# Altium PCB CPLD_CLK_V2.0.PcbDoc
Units mm, origin at the board's own origin, x right, y up, seen from the top; angles counter-clockwise.
Board outline 48.26 x 29.21 mm, 2 copper layers (Top Layer, Bottom Layer); 41 components, 46 nets, 228 pads, 29 vias.
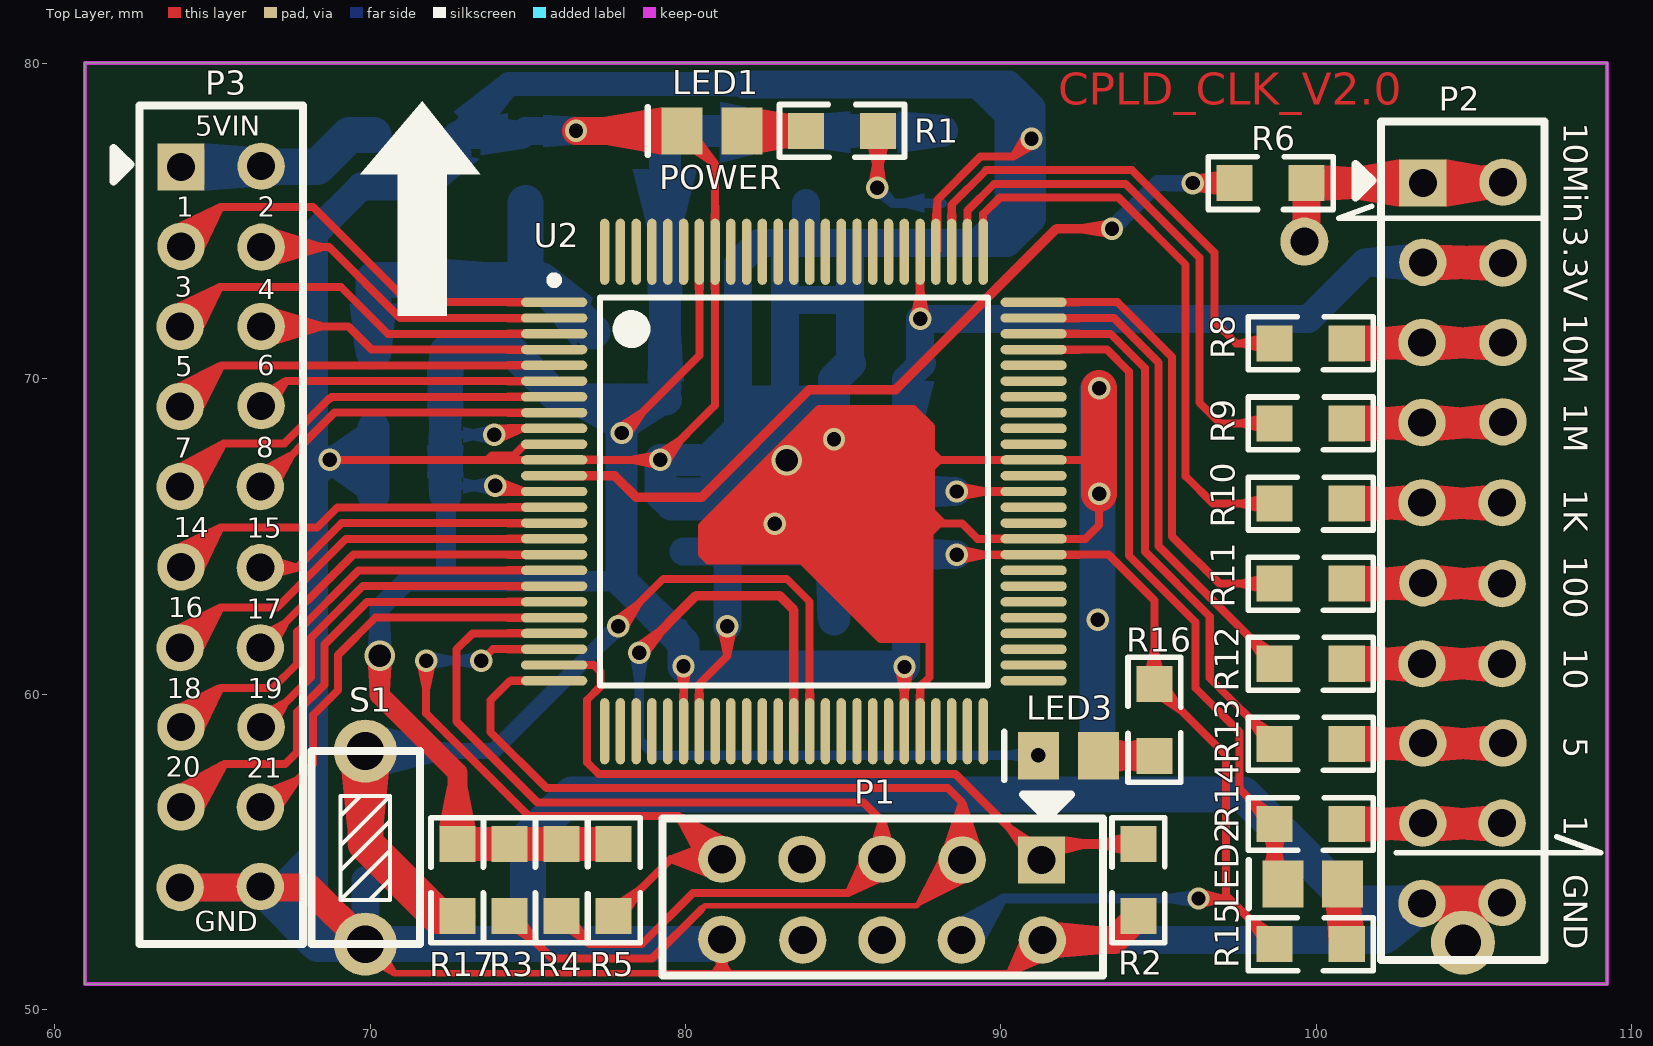
[diagram p0: Top Layer view]
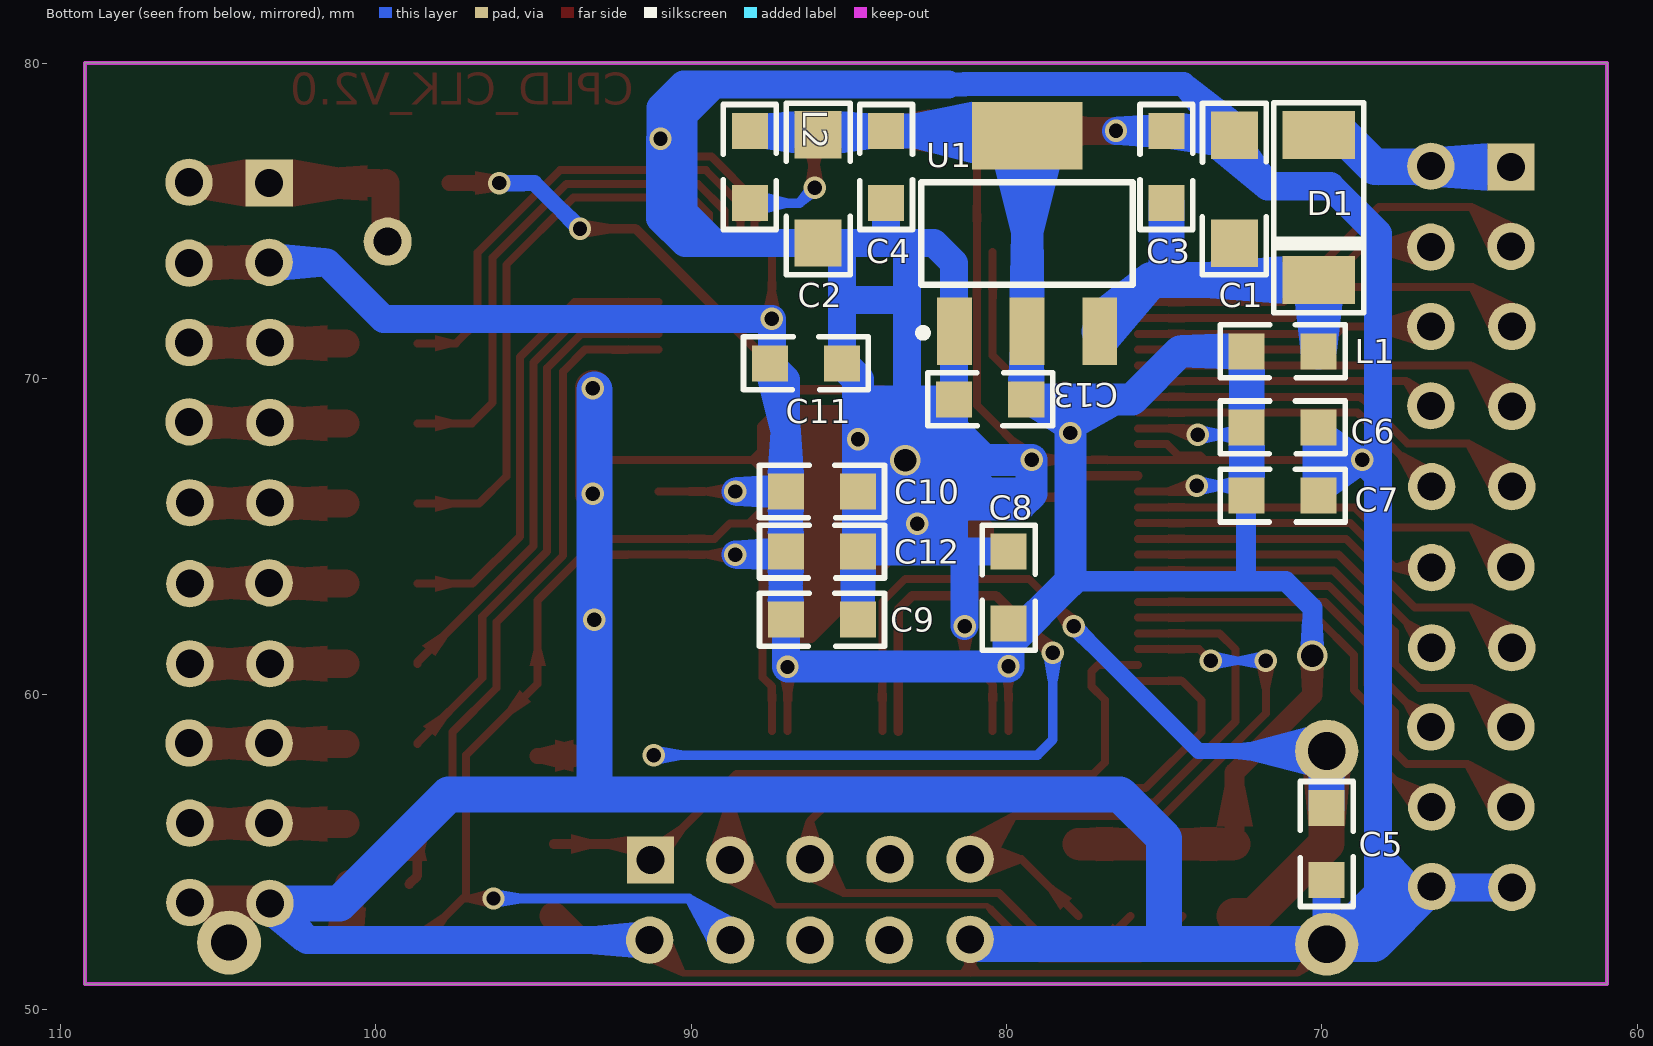
[diagram p1: Bottom Layer view, seen from below]

## Layer stack, top to bottom
Top Solder: solder mask 0.0102, Solder Resist, Dk 3.5
Top Layer: signal copper 0.0356
Dielectric 1: dielectric 0.32, FR-4, Dk 4.8
Bottom Layer: signal copper 0.0356
Bottom Solder: solder mask 0.0102, Solder Resist, Dk 3.5

## Board outline
60.96,80.01 109.22,80.01 109.22,50.8 60.96,50.8

## Design rules (kind name [scope] priority, off if disabled: settings)
Clearance [All] p1: gap=0.178
ComponentClearance [All] p1 off: gap=0 collisioncheckmode=3 verticalgap=0 showdistances=FALSE
PolygonConnect [All] p1: connectstyle=Relief reliefconductorwidth=0.254 reliefentries=4 polygonreliefangle="90 Angle" airgapwidth=0.254
RoutingVias [All] p1: holewidth=0.711 width=1.27 viastyle="Through Hole" minholewidth=0.711 minwidth=1.27 maxholewidth=0.711 maxwidth=1.27
SilkToBoardRegionClearance [All] p1 off:
SilkToSilkClearance [All] p1 off: silktosilkclearance=0.254
SilkToSolderMaskClearance [IsPad] p1 off: minsilkscreentomaskgap=0.254 clearancetoexposedcopper=TRUE
SolderMaskExpansion [All] p1: expansion=0.102
Width [All] p1: maxlimit=2.54 minlimit=0.178 preferedwidth=0.254 minimp=50.000000 maximp=50.000000 favimp=50.000000
26 further rules are at their usual default settings.

## Components (designator, comment, footprint, x,y, rotation, side; value= is the part's Value field where it differs from the comment)
C1 "10uF" 1206 72.771,74.295 r90 bottom
C2 "10uF" 1206 85.979,77.724 r270 bottom
C3 "0.1uF" 0805 74.93,77.851 r270 bottom
C4 "0.1uF" 0805 83.82,75.565 r90 bottom
C5 "104" 0805 69.85,54.102 r90 bottom
C6 "0.1uF" 0805 70.104,68.453 r0 bottom
C7 "0.1uF" 0805 70.104,66.294 r0 bottom
C8 "0.1uF" 0805 79.934,64.516 r270 bottom
C9 "0.1uF" 0805 84.709,62.357 r0 bottom
C10 "0.1uF" 0805 84.709,66.421 r0 bottom
C11 "0.1uF" 0805 85.217,70.485 r0 bottom
C12 "0.1uF" 0805 84.709,64.516 r0 bottom
C13 "0.1uF" 0805 81.661,69.342 r180 bottom
D1 "1N5819" "二极管 贴片 2010" 70.104,77.724 r270 bottom
L1 "磁珠" 0805 70.104,70.866 r0 bottom
L2 "磁珠" 0805 88.138,77.851 r270 bottom
LED1 "红色" LED0805 81.788,77.851 r180 top
LED2 "红色" LED0805 100.838,53.975 r180 top
LED3 "红色" LED0805 93.091,58.039 r180 top
P1 "DC3压线座" "双排插针 2.54 2*5" 91.313,54.737 r270 top
P2 "双排插针2.54 2*10" "双排插针 2.54 2*10" 103.378,76.2 r0 top
P3 "双排插针2.54 2*10" "双排插针 2.54 2*10" 64.008,76.708 r0 top locked
R1 "4.7K" 0805 83.82,77.851 r0 top
R2 "1k" 0805 94.361,55.245 r270 top
R3 "10k" 0805 74.422,55.245 r270 top
R4 "10k" 0805 76.073,55.245 r270 top
R5 "10k" 0805 77.724,52.959 r90 top
R6 "49.9" 0805 97.409,76.2 r0 top
R8 "49.9" 0805 98.679,71.12 r0 top
R9 "49.9" 0805 98.679,68.58 r0 top
R10 "49.9" 0805 98.679,66.04 r0 top
R11 "49.9" 0805 98.679,63.5 r0 top
R12 "49.9" 0805 98.679,60.96 r0 top
R13 "49.9" 0805 98.679,58.42 r0 top
R14 "49.9" 0805 98.679,55.88 r0 top
R15 "4.7K" 0805 98.679,52.07 r0 top
R16 "100" 0805 94.869,58.039 r90 top
R17 "10k" 0805 72.771,55.245 r270 top
S1 "key" "按键 轻触  6*3" 69.85,52.07 r180 top
U1 "AZ1117H-3.3V" SOT223 81.661,71.501 r180 bottom
U2 "EPM240T100C5N" TQFP100 83.439,66.421 r0 top locked

## Footprints (in the part's own frame and the unit in brackets; to place one, negate y for a bottom-side part, rotate by r counter-clockwise, add the part's x,y. Pads: shape width x height; smd on the part's side, far side on the other; paste and mask are expansions set on the pad)
0805 [mil]
  rect 45x45 smd: 1(0,0) 2(90,0)
  silkscreen extent -33,-33 123,33
1206 [mm]
  rect 1.5x1.5 smd: 1(-0.005,0) 2(3.424,0)
  silkscreen extent -1.01,-1.01 4.43,1.02
LED0805 [mm] "Chip Capacitor; Body 2.0 x 1.2 mm (LxW typ)"
  rect 1.3x1.5 smd: 1(0,0) 2(1.9,0)
  silkscreen extent 2.98,-0.76 2.98,0.76
SOT223 [mm] "SOT-223/SC-73; 4 Leads; Body 6.7 x 7.3 mm, inc. leads (LxW max)"
  rect 1.1x2.15 smd: 1(0.011,-0.001) 2(2.311,-0.001) 3(4.611,-0.001)
  rect 3.5x2.15 smd: 4(2.311,6.199)
  silkscreen extent -1.11,-0.18 5.66,4.72
TQFP100 [mm] "Thin QFP, 100-Leads, Body 14x14mm, Pitch 0.5mm, IPC Low Density"
  oval 2.1x0.3 smd: 1(-7.6,6) 2(-7.6,5.5) 3(-7.6,5) 4(-7.6,4.5) 5(-7.6,4) 6(-7.6,3.5) 7(-7.6,3) 8(-7.6,2.5) 9(-7.6,2) 10(-7.6,1.5) 11(-7.6,1) 12(-7.6,0.5) 13(-7.6,0) 14(-7.6,-0.5) 15(-7.6,-1) 16(-7.6,-1.5) 17(-7.6,-2) 18(-7.6,-2.5) 19(-7.6,-3) 20(-7.6,-3.5) 21(-7.6,-4) 22(-7.6,-4.5) 23(-7.6,-5) 24(-7.6,-5.5) 25(-7.6,-6) 51(7.6,-6) 52(7.6,-5.5) 53(7.6,-5) 54(7.6,-4.5) 55(7.6,-4) 56(7.6,-3.5) 57(7.6,-3) 58(7.6,-2.5) 59(7.6,-2) 60(7.6,-1.5) 61(7.6,-1) 62(7.6,-0.5) 63(7.6,0) 64(7.6,0.5) 65(7.6,1) 66(7.6,1.5) 67(7.6,2) 68(7.6,2.5) 69(7.6,3) 70(7.6,3.5) 71(7.6,4) 72(7.6,4.5) 73(7.6,5) 74(7.6,5.5) 75(7.6,6)
  oval 0.3x2.1 smd: 26(-6,-7.6) 27(-5.5,-7.6) 28(-5,-7.6) 29(-4.5,-7.6) 30(-4,-7.6) 31(-3.5,-7.6) 32(-3,-7.6) 33(-2.5,-7.6) 34(-2,-7.6) 35(-1.5,-7.6) 36(-1,-7.6) 37(-0.5,-7.6) 38(0,-7.6) 39(0.5,-7.6) 40(1,-7.6) 41(1.5,-7.6) 42(2,-7.6) 43(2.5,-7.6) 44(3,-7.6) 45(3.5,-7.6) 46(4,-7.6) 47(4.5,-7.6) 48(5,-7.6) 49(5.5,-7.6) 50(6,-7.6) 76(6,7.6) 77(5.5,7.6) 78(5,7.6) 79(4.5,7.6) 80(4,7.6) 81(3.5,7.6) 82(3,7.6) 83(2.5,7.6) 84(2,7.6) 85(1.5,7.6) 86(1,7.6) 87(0.5,7.6) 88(0,7.6) 89(-0.5,7.6) 90(-1,7.6) 91(-1.5,7.6) 92(-2,7.6) 93(-2.5,7.6) 94(-3,7.6) 95(-3.5,7.6) 96(-4,7.6) 97(-4.5,7.6) 98(-5,7.6) 99(-5.5,7.6) 100(-6,7.6)
  silkscreen extent -7.72,-6.15 6.15,6.82
"二极管 贴片 2010" [mil]
  rect 60x91 smd: 1(0,0) 2(181,0)
  silkscreen extent -40,-56 222,56
"双排插针 2.54 2*5" [mm]
  rect 1.5x1.5 hole 0.889: 1(0,-0.025)
  round 1.5 hole 0.889: 2(2.54,0) 3(0,-2.54) 4(2.54,-2.565) 5(-0.025,-5.08) 6(2.54,-5.08) 7(-0.025,-7.62) 8(2.54,-7.595) 9(-0.025,-10.16) 10(2.515,-10.16)
  silkscreen extent -2.08,-12.04 3.66,1.93
"双排插针 2.54 2*10" [mil]
  rect 59.06x59.06 hole 35: 1(0,0)
  round 59.06 hole 35: 2(100,1) 3(0,-99) 4(100,-100) 5(-1,-199) 6(100,-199) 7(-1,-299) 8(100,-298) 9(-1,-399) 10(99,-399) 11(0,-499) 12(99,-500) 13(-1,-600) 14(99,-600) 15(0,-699) 16(100,-699) 17(0,-799) 18(99,-799) 19(-1,-899) 20(99,-898)
  silkscreen extent -84,-970 152,77
"按键 轻触  6*3" [mm]
  round 2 hole 1.2: 1(0,0) 2(0,-6.121)
  silkscreen extent -1.73,-6.12 1.7,0

## Part data
C1 C2: library part "Cap Pol1", "Polarized Capacitor (Radial)"
C3 C4 C5 C6 C7 C8 C9 C10 C11 C12 C13: library part "电容 贴片 0805"
D1: library part "二极管 1N5822"
LED1 LED2 LED3: library part "二极管 贴片发光 0805"
P1: library part "联结件 DC3 2*5"
P2 P3: library part "联结件 双排插针 2.54 2*10"
R1 R2 R3 R4 R5 R6 R8 R9 R10 R11 R12 R13 R14 R15 R16 R17: library part "电阻 贴片 0805"
S1: library part "按键 轻触 6*6"
U1: library part "贴片芯片 SPX1117M3-5.0"

## Free pads (board coordinates)
  round 1.524 hole 0.889: 0(99.619,74.346)
  round 2.032 hole 1.143: 0(104.648,52.121)

## Via types
v1: diameter 0.711, hole 0.457, Top Layer to Bottom Layer, 27 vias
v2: diameter 0.965, hole 0.711, Top Layer to Bottom Layer, 2 vias

## Nets (pads, with @x,y where several pads share a name; then routed paths per layer and width w, separated by ;. In a path a pad name is that pad's centre, name@x,y a point inside that pad or via, vN(x,y) a via of type N, cw(c..) or ccw(c..) an arc to the next point about the centre after c; other vN are vias at no path point)
5V: D1.1 P3.1 P3.2 | length 6.5
  Bottom Layer w1.143: P3.1 68.326,76.708 69.342,77.724 D1.1
10M_IN: P2.1 P2.2 pad.0@99.619,74.346 R6.2 | length 8
  Top Layer w0.889: pad.0@99.695,74.143 R6.2 ; R6.2@99.949,76.2 P2.1 P2.2@105.893,76.2
+3.3V: C2.1 C4.2 C6.2 C7.2 C8.2 C9.2 C10.2 C11.2 C12.2 C13.2 L1.2 L2.1 P1.4 P2.3 P2.4 R3.1 R4.1 R5.2 R15.1 R16.2 R17.1 U1.2 U1.4 U2.9 U2.13 U2.31 U2.45 U2.59 U2.63 U2.80 U2.94 | length 155.9
  Top Layer w0.254: v1@74.136,68.421 U2.9 ; v1@74.143,66.421 U2.13 ; v1(77.978,68.275) 80.439,70.736 U2.94 ; U2.31 v1(79.939,60.879) ; U2.45 v1@86.939,61.082 ; v1(87.439,71.894) U2.80 ; v1(88.595,64.421) U2.59 93.414,64.421 94.869,62.966 R16.2 97.13,58.064 97.13,53.619 ; v1(88.595,66.421) U2.63 ; v1(96.266,53.518) 97.028,53.518 ; 97.447,53.302 97.231,53.518 ; R15.1 97.231,53.518 ; 97.028,53.518 97.13,53.619 ; 97.028,53.518 97.231,53.518 ; 97.13,53.619 97.231,53.518
  Top Layer w0.635: v2(70.307,61.214) 70.307,59.969 72.771,57.506 R17.1
  Top Layer w1.016: R17.1 R3.1 R4.1 R5.2 ; P2.3 P2.4@105.893,73.685
  Bottom Layer w0.254: C7.2 72.695,66.599 v1(73.965,66.599) ; C6.2 72.619,68.224 v1(73.939,68.224) ; v1@79.934,60.884 C8.2 ; C9.2@86.944,62.306 C9.2
  Bottom Layer w0.305: P1.4 90.068,53.518 v1(96.266,53.518)
  Bottom Layer w0.635: v2(70.307,61.214) 70.307,62.738 71.145,63.576 72.415,63.576 ; C7.2@72.415,66.269 72.415,63.576 ; 77.978,63.576 72.415,63.576
  Bottom Layer w0.889: v1@86.995,60.909 C9.2 C12.2 ; v1(88.595,64.421) 87.09,64.421 C12.2 ; v1(88.595,66.421) C10.2 ; P2.3 101.549,73.685 99.758,71.894 v1(87.439,71.894) 87.439,70.549 C11.2 86.995,69.977 C10.2 ; C12.2 C10.2
  Bottom Layer w1.016: C7.2 C6.2 L1.2 74.498,70.866 76.022,69.342 77.978,69.342 ; C13.2@79.35,69.367 U1.2 U1.4 ; C13.2 77.978,69.342 ; U1.4@79.501,77.851 C4.2 L2.1 ; v1@86.924,60.879 v1(79.939,60.879) 79.939,61.615 77.978,63.576 v1(77.978,68.275) 77.978,69.342
  other v1: 86.944,60.858
CLK_1: LED2.2 R14.1 U2.72 | length 21.6
  Top Layer w0.254: U2.72 93.363,70.921 94.056,70.228 94.056,64.389 96.164,62.281 96.164,60.198 97.561,58.801 97.561,56.998 R14.1
  Top Layer w0.305: R14.1 98.679,54.234 LED2.2
CLK_1K: R10.1 U2.76 | length 18.6
  Top Layer w0.254: U2.76 89.439,75.214 89.968,75.743 93.726,75.743 95.86,73.609 95.86,66.904 96.723,66.04 R10.1
CLK_1M: R9.1 U2.77 | length 17.2
  Top Layer w0.254: U2.77 88.939,75.325 89.789,76.175 93.955,76.175 96.291,73.838 96.291,69.24 96.952,68.58 R9.1
CLK_5: R13.1 U2.73 | length 17.6
  Top Layer w0.254: U2.73 93.474,71.421 94.564,70.33 94.564,64.516 96.622,62.459 96.622,60.503 98.679,58.445 R13.1
CLK_10: R12.1 U2.74 | length 15.6
  Top Layer w0.254: U2.74 93.584,71.921 94.996,70.509 94.996,64.695 98.679,61.012 R12.1
CLK_10M: R8.1 U2.78 | length 15.7
  Top Layer w0.254: U2.78 88.439,75.51 89.535,76.606 94.158,76.606 96.774,73.99 96.774,71.806 97.46,71.12 R8.1
CLK_100: R11.1 U2.75 | length 14.7
  Top Layer w0.254: U2.75 93.695,72.421 95.428,70.688 95.428,64.999 96.926,63.5 R11.1
GND: C1.2 C2.2 C3.1 C4.1 C5.1 C6.1 C7.1 C8.1 C9.1 C10.1 C11.1 C12.1 C13.1 LED1.2 P1.2 P1.10 P2.19 P2.20 P3.19 P3.20 pad.0@104.648,52.121 R2.2 S1.1 U1.1 U2.10 U2.11 U2.32 U2.46 U2.60 U2.65 U2.79 U2.93 | length 355.9
  Top Layer w0.203: S1.1 70.777,51.143 81.153,51.143 ; P1.10 81.153,51.143 ; P1.2 90.259,51.143 81.153,51.143
  Top Layer w0.254: v1(68.723,67.421) U2.11 v1(79.207,67.421) 80.939,69.153 U2.93 80.939,76.8 LED1.2 ; 73.72,67.421 73.863,67.564 74.558,67.564 74.915,67.921 U2.10 ; U2.32 80.439,60.322 81.331,61.214 v1(81.331,62.154) ; v1(82.829,65.405) 87.782,65.405 ; U2.46 87.439,60.236 87.732,60.528 87.732,61.747 ; 87.605,66.98 87.782,67.158 ; 87.605,67.869 87.782,67.691 ; U2.79 87.984,74.066 87.984,75.666 89.356,77.038 90.399,77.038 v1(90.97,77.61) ; v1(93.116,66.345) 93.116,65.354 92.683,64.921 U2.60 89.257,64.921 88.773,65.405 88.163,65.405 ; 93.116,67.412 93.107,67.421 U2.65 88.052,67.421 ; 83.261,68.072 84.226,69.037 87.224,69.037 87.782,68.478 87.782,67.691 ; 83.261,68.072 80.518,65.329 80.518,64.44 80.721,64.237 83.693,64.237 86.182,61.747 87.732,61.747 ; 83.261,68.072 v1(84.709,68.072) 85.36,67.421 87.782,67.421 ; 87.732,61.747 87.732,65.087 ; 87.732,65.087 87.732,65.354 87.782,65.405 ; 87.732,65.087 88.049,65.405 ; 87.782,65.405 87.782,65.786 ; 87.782,65.405 88.049,65.405 ; 87.782,65.786 87.782,67.158 ; 87.782,65.786 88.163,65.405 ; 87.782,67.158 87.782,67.421 ; 87.782,67.158 88.046,67.421 ; 87.782,67.421 88.046,67.421 ; 87.782,67.421 87.782,67.691 ; 87.782,67.691 88.052,67.421 ; 88.046,67.421 88.052,67.421 ; 88.049,65.405 88.163,65.405
  Top Layer w0.889: P3.19 68.047,53.873 S1.1 ; v1(76.53,77.851) LED1.2 ; P1.2 93.599,52.197 R2.2
  Top Layer w1.143: v1(93.116,66.345) 93.116,67.412 v1(93.116,69.698) ; P2.19 P2.20@105.867,53.365 ; pad.0@104.648,52.121 104.648,53.315
  Bottom Layer w0.762: C1.2 74.386,79.334 81.331,79.334 81.34,79.324 81.839,79.324
  Bottom Layer w0.889: P3.19 66.548,53.873 P3.20@67.208,53.873 ; 67.856,54.064 68.228,53.692 ; 68.351,52.07 68.351,52.73 P3.20@67.208,53.873 ; 68.478,53.442 68.228,53.692 ; v1(68.723,67.421) 68.228,66.926 ; C5.1 S1.1 68.228,53.692 ; C1.2@72.771,77.14 71.73,76.098 69.723,76.098 68.228,74.603 68.228,66.926 ; C1.2 C3.1@74.798,77.719 ; C3.1 v1(76.53,77.851) ; C8.1 81.255,64.516 ; v1(81.331,62.154) 81.331,64.44 81.255,64.516 ; 81.839,79.324 89.281,79.324 ; v1(82.829,65.405) 82.855,65.38 82.855,64.922 ; 83.153,69.463 83.153,74.3 ; 83.179,72.492 85.217,72.492 ; C4.1 83.82,74.3 ; C12.1@84.547,64.922 82.855,64.922 ; 84.607,69.342 C13.1 ; C12.1 82.855,64.516 ; C11.1 85.217,72.492 ; 85.217,74.173 85.217,72.492 ; v1(90.97,77.61) 90.97,78.6 90.246,79.324 89.281,79.324 ; v1@90.983,77.61 90.983,75.082 90.2,74.3 89.256,74.3 ; P1.2 102.184,52.197 P2.19 ; P3.20@67.208,53.873 68.228,54.893 ; 68.228,53.692 68.228,54.893 ; 68.228,54.893 68.228,66.926 ; 81.255,64.516 82.855,64.516 ; C13.1 81.661,68.351 81.661,67.421 81.661,66.015 81.661,64.922 82.855,64.922 ; C13.1 81.661,73.66 82.301,74.3 83.153,74.3 ; 82.855,64.516 82.855,64.922 ; 83.153,74.3 83.82,74.3 ; 83.82,74.3 C2.2 89.256,74.3 ; 89.256,74.3 90.241,75.286 90.241,78.364 89.281,79.324
  Bottom Layer w1.016: v1@68.77,67.373 70.104,67.373 ; C7.1 70.104,67.373 ; C6.1 70.104,67.373 ; 81.102,66.802 80.661,66.361 79.207,66.361 ; 81.661,66.015 79.553,66.015 79.207,66.361 ; 81.661,68.351 80.731,67.421 ; 81.712,65.583 84.709,65.583 ; 81.737,68.656 84.709,68.656 ; 81.813,66.421 C10.1 ; 81.864,68.072 v1(84.709,68.072) ; C9.1 C12.1 84.709,65.583 ; C11.1 84.709,69.977 84.709,68.656 ; 79.207,66.361 v1(79.207,67.421) 80.731,67.421 ; 80.731,67.421 81.661,67.421 84.591,67.421 84.709,67.539 ; 84.709,65.583 C10.1 ; C10.1 84.709,67.539 ; 84.709,67.539 v1(84.709,68.072) ; v1(84.709,68.072) 84.709,68.656
  Bottom Layer w1.143: P3.20 66.548,53.873 68.351,52.07 S1.1 75.006,52.07 ; P1.10 81.001,52.07 75.006,52.07 ; v1@93.066,69.647 v1(93.066,62.357) 93.066,56.82 ; P2.19 101.143,53.365 97.688,56.82 93.066,56.82 ; 75.006,52.07 75.006,55.423 76.403,56.82 93.066,56.82
  other v2: 83.21,67.412
IO1: P3.3 U2.1 | length 13.6
  Top Layer w0.254: P3.3 65.253,75.438 68.199,75.438 71.216,72.421 U2.1
IO2: P3.4 U2.2 | length 10.2
  Top Layer w0.254: P3.4 68.707,74.168 70.954,71.921 U2.2
IO3: P3.5 U2.3 | length 13
  Top Layer w0.254: P3.5 65.227,72.898 69.088,72.898 70.565,71.421 U2.3
IO4: P3.6 U2.4 | length 9.6
  Top Layer w0.254: P3.6 69.317,71.653 70.049,70.921 U2.4
IO5: P3.7 U2.5 | length 12.4
  Top Layer w0.254: P3.7 65.29,70.421 U2.5
IO6: P3.8 U2.6 | length 9.6
  Top Layer w0.254: P3.8 67.33,69.921 U2.6
IO7: P3.9 U2.7 | length 13
  Top Layer w0.254: P3.9 65.354,67.945 67.284,67.945 68.691,69.353 68.718,69.353 68.786,69.421 U2.7
IO8: P3.10 U2.8 | length 10.3
  Top Layer w0.254: P3.10 68.87,68.921 U2.8
IO14: P3.11 U2.14 | length 12.6
  Top Layer w0.254: P3.11 65.253,65.278 68.326,65.278 68.969,65.921 U2.14
IO15: P3.12 U2.15 | length 9.9
  Top Layer w0.254: P3.12 67.691,64.008 69.104,65.421 U2.15
IO16: P3.13 U2.16 | length 13.3
  Top Layer w0.254: P3.13 65.253,62.738 67.056,62.738 69.239,64.921 U2.16
IO17: P3.14 U2.17 | length 10.5
  Top Layer w0.254: P3.14 69.476,64.421 U2.17
IO18: P3.15 U2.18 | length 14.5
  Top Layer w0.254: P3.15 65.253,60.198 66.929,60.198 67.691,60.96 67.691,61.976 69.636,63.921 U2.18
IO19: P3.16 U2.19 | length 11.9
  Top Layer w0.254: P3.16 68.123,60.528 68.123,61.773 69.771,63.421 U2.19
IO20: P3.17 U2.20 | length 16
  Top Layer w0.254: P3.17 65.38,57.785 67.31,57.785 67.691,58.166 67.691,59.436 68.555,60.3 68.555,61.57 69.906,62.921 U2.20
IO21: P3.18 U2.21 | length 13.4
  Top Layer w0.254: P3.18 66.827,56.413 68.199,57.785 68.199,59.333 68.986,60.121 68.986,61.239 70.168,62.421 U2.21
JTAG-TCK: P1.1 R2.1 U2.24 | length 22.9
  Top Layer w0.254: U2.24 77.103,60.921 77.306,60.718 77.306,60.237 76.886,59.817 76.886,57.831 77.251,57.466 88.558,57.466 P1.1
  Top Layer w0.305: P1.1@91.796,55.245 R2.1
JTAG-TDI: P1.9 R5.1 U2.23 | length 21.3
  Top Layer w0.254: v1(71.78,61.062) 71.78,59.385 75.032,56.134 79.781,56.134 P1.9 79.527,54.762 R5.1 ; v1(73.533,61.062) 73.892,61.421 U2.23
  Bottom Layer w0.254: v1(71.78,61.062) v1(73.533,61.062)
JTAG-TDO: P1.3 R3.2 U2.25 | length 37.2
  Top Layer w0.178: 80.493,53.162 80.62,53.289 87.325,53.289 P1.3
  Top Layer w0.254: R3.2 75.768,51.613 78.943,51.613 80.493,53.162 ; U2.25 74.442,60.421 73.812,59.792 73.812,58.801 75.59,57.023 88.316,57.023 88.773,56.566 P1.3
JTAG-TMS: P1.5 R4.2 U2.22 | length 33.2
  Top Layer w0.254: U2.22 73.249,61.921 72.746,61.417 72.746,59.131 75.311,56.566 85.649,56.566 86.233,55.982 P1.5 85.166,53.696 80.239,53.696 78.613,52.07 76.962,52.07 R4.2
NetC1_1: C1.1 C3.2 D1.2 L1.1 U1.3 | length 12.2
  Bottom Layer w1.143: L1.1 D1.2 75.423,73.127 U1.3 ; 74.93,73.254 C3.2
NetC5_2: C5.2 R17.2 S1.2 U2.39 | length 29.4
  Top Layer w0.254: v1@77.838,62.192 79.299,63.652 83.21,63.652 83.939,62.924 U2.39
  Top Layer w1.143: S1.2 69.85,55.27 72.161,52.959 R17.2
  Bottom Layer w0.508: S1.2 73.914,58.191 v1(77.876,62.154)
  Bottom Layer w1.143: C5.2 S1.2
NetL2_2: L2.2 R1.2 | length 4
  Top Layer w0.305: v1@86.106,76.073 R1.2
  Bottom Layer w0.305: v1(86.081,76.048) 86.563,75.565 L2.2
NetLED1_1: LED1.1 R1.1 | length 2
  Top Layer w0.889: LED1.1 R1.1
NetLED2_1: LED2.1 R15.2 | length 1.8
  Top Layer w0.889: R15.2@100.838,52.197 LED2.1
NetLED3_1: LED3.1 R16.1 | length 1.8
  Top Layer w0.508: LED3.1 R16.1
NetLED3_2: LED3.2 U2.38 | length 25.3
  Top Layer w0.305: v1(78.537,61.316) 80.34,63.119 82.982,63.119 83.439,62.662 U2.38
  Bottom Layer w0.305: v1(78.537,61.316) 78.537,58.547 79.019,58.064 v1(91.186,58.064)
NetP2_5: P2.5 P2.6 R8.2 | length 4.9
  Top Layer w0.889: R8.2 P2.6@105.893,71.12
NetP2_7: P2.7 P2.8 R9.2 | length 4.9
  Top Layer w0.889: R9.2 P2.8@105.893,68.58
NetP2_9: P2.9 P2.10 R10.2 | length 4.9
  Top Layer w0.889: R10.2 P2.10@105.893,66.04
NetP2_11: P2.11 P2.12 R11.2 | length 4.9
  Top Layer w0.889: R11.2 P2.12
NetP2_13: P2.13 P2.14 R12.2 | length 4.9
  Top Layer w0.889: R12.2 P2.14
NetP2_15: P2.15 P2.16 R13.2 | length 4.9
  Top Layer w0.889: R13.2 P2.16@105.893,58.42
NetP2_17: P2.17 P2.18 R14.2 | length 4.9
  Top Layer w0.889: R14.2 P2.18@105.893,55.88
NetR6_1: R6.1 U2.12 | length 26.2
  Top Layer w0.305: U2.12 77.757,66.921 78.435,66.243 80.518,66.243 83.922,69.647 86.665,69.647 91.77,74.752 v1(93.523,74.752)
  Top Layer w0.508: v1(96.088,76.2) R6.1@97.663,76.2
  Bottom Layer w0.508: v1(93.523,74.752) 94.971,76.2 v1(96.088,76.2)
pads on no net: P1.6 P1.7 P1.8 U2.26 U2.27 U2.28 U2.29 U2.30 U2.33 U2.34 U2.35 U2.36 U2.37 U2.40 U2.41 U2.42 U2.43 U2.44 U2.47 U2.48 U2.49 U2.50 U2.51 U2.52 U2.53 U2.54 U2.55 U2.56 U2.57 U2.58 U2.61 U2.62 U2.64 U2.66 U2.67 U2.68 U2.69 U2.70 U2.71 U2.81 U2.82 U2.83 U2.84 U2.85 U2.86 U2.87 U2.88 U2.89 U2.90 U2.91 U2.92 U2.95 U2.96 U2.97 U2.98 U2.99 U2.100

## Keep-outs
Keep-Out Layer:
  the board outline again, w0.127

## Other copper
Top Layer:
  region net GND: 84.226,69.037 87.224,69.037 87.782,68.478 87.732,68.428 87.732,61.747 86.182,61.747 83.693,64.237 80.721,64.237 80.518,64.44 80.518,65.329
  text "CPLD_CLK_V2.0" at 91.821,78.689 h1.02

## Silkscreen, mask and mechanical layers (free items; w line width, h text height)
Top Overlay:
  rectangle: 70.866,71.984 72.441,77.572
  region: 73.497,76.479 71.653,78.791 69.693,76.479
  lines w0.178: 101.752,75.463 100.711,75.082 107.188,75.082 ; 102.54,54.966 109.017,54.966 107.62,55.474
  text "10Min" at 107.848,78.105 h0.76 r270
  text "5VIN" at 64.465,77.699 h0.64
  text "POWER" at 79.172,75.997 h0.76
  text "1" at 63.856,75.133 h0.64
  text "2" at 66.446,75.133 h0.64
  text "3.3V" at 107.848,74.828 h0.76 r270
  text "3" at 63.805,72.593 h0.64
  text "4" at 66.446,72.517 h0.64
  text "10M" at 107.848,72.06 h0.76 r270
  text "6" at 66.421,70.104 h0.64
  text "5" at 63.83,70.079 h0.64
  text "1M" at 107.848,69.215 h0.76 r270
  text "8" at 66.396,67.513 h0.64
  text "7" at 63.805,67.488 h0.64
  text "1K" at 107.848,66.497 h0.76 r270
  text "14" at 63.779,64.973 h0.64
  text "15" at 66.091,64.948 h0.64
  text "100" at 107.848,64.389 h0.76 r270
  text "16" at 63.602,62.433 h0.64
  text "17" at 66.091,62.382 h0.64
  text "10" at 107.848,61.468 h0.76 r270
  text "18" at 63.551,59.868 h0.64
  text "19" at 66.116,59.868 h0.64
  text "5" at 107.848,58.623 h0.76 r270
  text "20" at 63.525,57.379 h0.64
  text "21" at 66.091,57.353 h0.64
  text "1" at 107.848,56.159 h0.76 r270
  text "GND" at 107.848,54.28 h0.76 r270
  text "GND" at 64.44,52.476 h0.64